# Altium PCB simple-VCA.PcbDoc
Units mm, origin at the board's own origin, x right, y up, seen from the top; angles counter-clockwise.
Board outline 70 x 95 mm, 2 copper layers (Top Layer, Bottom Layer), stack 1.584 mm thick; 98 components, 53 nets, 269 pads, 0 vias.
Unrouted connection lines stored in the file: 182.
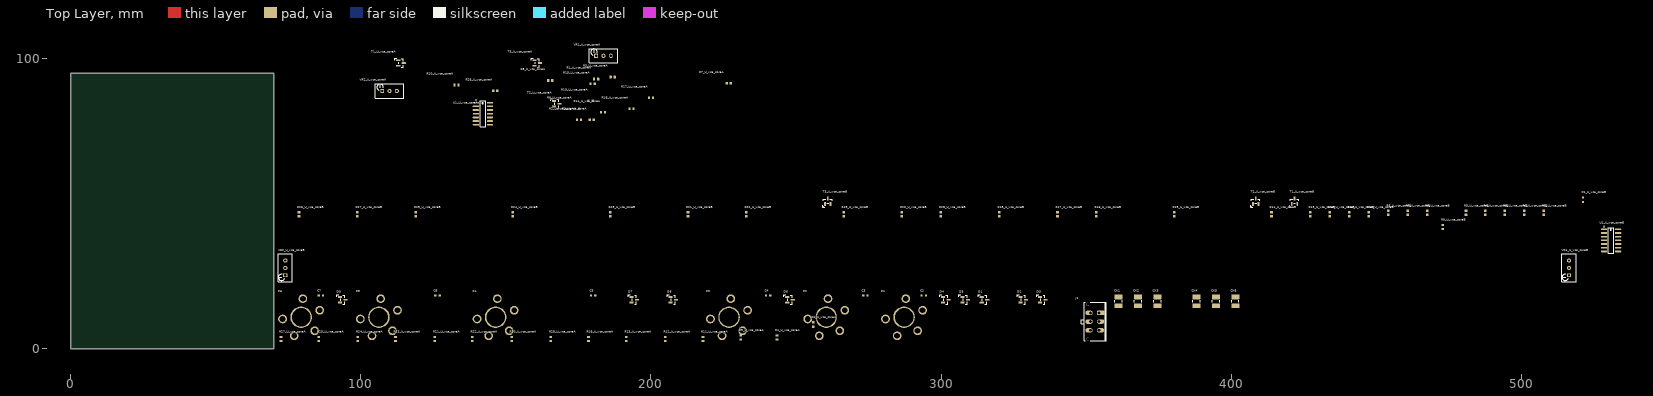
[diagram p0: Top Layer view]
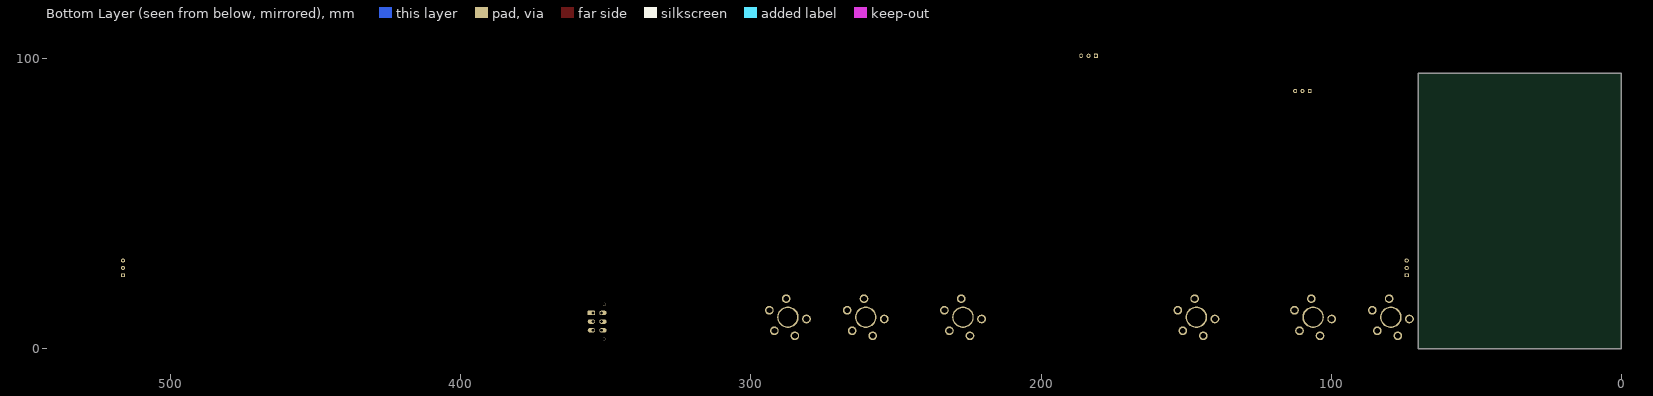
[diagram p1: Bottom Layer view, seen from below]

## Layer stack, top to bottom
Top Solder Mask: solder mask 0.005, Solder Resist, Dk 3.5
Top Layer: signal copper 0.035
Dielectric 1: core 1.514, FR-4, Dk 4.2
Bottom Layer: signal copper 0.035
Botom Solder Mask: solder mask 0.005, Solder Resist, Dk 3.5

## Board outline
0,0 0,95 70,95 70,0

## Design rules (kind name [scope] priority, off if disabled: settings)
AssemblyTestPointUsage [All] p1 off: valid=2 // Not used
AssemblyTestpoint AssemblyTestpoint_THT [(IsVia) Or (IsPad And OnMultiLayer)] p1: testpointundercomponent=TRUE minsize=0 maxsize=100 preferedsize=0 minholesize=0 maxholesize=100 preferedholesize=0 testpointgrid=0.025 usegrid=FALSE gridtolerance=0 allowsidetop=TRUE allowsidebottom=TRUE minspacing=2.54 // THT testpoints (component pads)
AssemblyTestpoint AssemblyTestpoint_SMD [(IsPad And (OnTopLayer Or OnBottomLayer)) and not(HasFootprint('FXPSWITCH_PAD') or HasFootprint ('FXPSWITCH_PAD_ALT1'))] p2: testpointundercomponent=TRUE minsize=1 maxsize=100 preferedsize=0 minholesize=0 maxholesize=100 preferedholesize=0 testpointgrid=0.025 usegrid=FALSE gridtolerance=0 allowsidetop=TRUE allowsidebottom=TRUE minspacing=2.54 padholecenterclearance=1 // SMD testpoints except present switch
AssemblyTestpoint [All] p3 off: testpointundercomponent=TRUE minsize=1.016 maxsize=2.54 preferedsize=1.524 minholesize=0 maxholesize=1.016 preferedholesize=0.813 testpointgrid=0.025 usegrid=TRUE gridtolerance=0 allowsidetop=TRUE allowsidebottom=TRUE
BoardOutlineClearance X_BoardOutlineClearance [HasFootprint('MOUSE_BITES_3X_2_4MM') or  HasFootprint('MOUSE_BITES_5X_2_4MM') or HasFootprint('IN_TAB_2_4_EXT')] p1: gap=0 ignorepadtopadclearanceinfootprint=FALSE // Excluded components
BoardOutlineClearance [All] p2: gap=0.3 ignorepadtopadclearanceinfootprint=FALSE
Clearance "NPT Hole" [(InPadClass('NPTH'))] p1: gap=0.3 ignorepadtopadclearanceinfootprint=FALSE except(0: Arc-Hole Track-Hole SMDPad-Hole THPad-Hole Via-Hole Fill-Hole Poly-Hole Region-Hole Text-Hole) // Copper Clearance to NPT Hole
Clearance [All] p2: gap=0.2 ignorepadtopadclearanceinfootprint=FALSE except(0: Arc-Hole Track-Hole SMDPad-Hole THPad-Hole Via-Hole Fill-Hole Poly-Hole Region-Hole Text-Hole)
ComponentClearance [Not (HasFootprint('PASTE_STENCIL')) vs Not (HasFootprint('PASTE_STENCIL'))] p1: gap=0.25 collisioncheckmode=3 verticalgap=0.25 showdistances=TRUE
FabricationTestPointUsage [All] p1 off: valid=0 allowmultiple=FALSE
FabricationTestpoint [All] p1 off: side=3 testpointundercomponent=TRUE minsize=1.016 maxsize=2.54 preferedsize=1.524 minholesize=0 maxholesize=1.016 preferedholesize=0.813 testpointgrid=0.025 allowsidetop=TRUE allowsidebottom=TRUE usegrid=TRUE gridtolerance=0
Height [All] p1: minheight=0 maxheight=80 prefheight=7
HoleSize [All] p1: absolutevalues=TRUE maxlimit=6 minlimit=0.35 maxpercent=80.000 minpercent=20.000
HoleToHoleClearance [All] p1: gap=0.25 allowstackedmicrovias=TRUE
MinimumAnnularRing [All] p1: minimumring=0.2
MinimumSolderMaskSliver [All] p1: minsoldermaskwidth=0.07
PlaneClearance [All] p1: clearance=0.15
PlaneConnect [All] p1: planeconnectstyle=Relief reliefexpansion=0.5 reliefentries=4 reliefconductorwidth=0.25 reliefairgap=0.25
PolygonConnect "Via Connect" [IsVia] p1: connectstyle=Direct reliefconductorwidth=0.254 reliefentries=4 polygonreliefangle="90 Angle" airgapwidth=0.254 // Via connection style
PolygonConnect [All] p2: connectstyle=Relief reliefconductorwidth=0.25 reliefentries=4 polygonreliefangle="90 Angle" airgapwidth=0.25
RoutingCorners [All] p1: cornerstyle=45-Degree minsetback=2.5 maxsetback=2.5
RoutingVias [All] p1: holewidth=0.4 width=0.8 viastyle="Through Hole" minholewidth=0.2 minwidth=0.6 maxholewidth=1 maxwidth=1.6 useviatemplates=TRUE viatemplateguid#1={26E1B80A-D5C0-4505-9623-F9CB59458B7C} viatemplateguid#2={36E1CC21-96E2-49A4-88B6-F2B68A4AE673} viatemplateguid#3={0111366E-BFF6-48C7-B537-6C96D691991D} viatemplateguid#4={0E0C0ADB-85E7-4A3B-837A-9DB01CC425C1} viatemplateguid#5={2AE59D33-7222-4D26-9EBE-4F327D78EEDC} viatemplateguid#6={04F958C5-3098-48F3-841F-9266846BFB57} viatemplateguid#7={3EBD0A92-59C6-4A03-9F1B-9C85124118A6} viatemplateguid#8={D374DE30-929E-4757-A35D-CCDF97954E77} viatemplateguid#9={7387BB7D-B2C7-482F-BFEA-A07FA82CF54E} viatemplatename#1=v50h15m22 viatemplatename#2=v60h20m28 viatemplatename#3=v80h40m48 viatemplatename#4=v110h70m78 viatemplatename#5=v140h90 viatemplatename#6=v160h100m108 viatemplatename#7=v170h110 viatemplatename#8=v200h130 viatemplatename#9=v260h150
SMDEntry [All] p1: side=TRUE corner=FALSE anyangle=FALSE
SMDEntry ResistorArray_Exit [HasFootprint('CAC-50P200X100-8M')] p2: side=TRUE corner=FALSE anyangle=FALSE
SMDToCorner ResistorArray_NeckDown [HasFootprint('CAC-50P200X100-8M')] p1: distance=78740
SilkToSilkClearance [All] p1: silktosilkclearance=0.1
SilkToSolderMaskClearance [IsPad] p1: minsilkscreentomaskgap=0.1 clearancetoexposedcopper=FALSE
SolderMaskExpansion "PTH Via" [IsVia] p1: expansion=0.075 istentingtop=FALSE soldermaskfromhole=TRUE
SolderMaskExpansion [All] p2: expansion=0.1 istentingtop=FALSE
Width [All] p1: maxlimit=5 minlimit=0.15 preferedwidth=0.3
16 further rules are at their usual default settings.

## Classes and differential pairs
channel class vca_core: U_vca_coreA U_vca_coreB
component class U_vca_coreB: C1_U_vca_coreB R1_U_vca_coreB R2_U_vca_coreB R3_U_vca_coreB R4_U_vca_coreB R5_U_vca_coreB R6_U_vca_coreB R7_U_vca_coreB R8_U_vca_coreB R9_U_vca_coreB R10_U_vca_coreB R11_U_vca_coreB R12_U_vca_coreB R13_U_vca_coreB R14_U_vca_coreB R15_U_vca_coreB R16_U_vca_coreB R17_U_vca_coreB R18_U_vca_coreB R19_U_vca_coreB R20_U_vca_coreB R21_U_vca_coreB R22_U_vca_coreB R23_U_vca_coreB R24_U_vca_coreB R25_U_vca_coreB R26_U_vca_coreB R27_U_vca_coreB R28_U_vca_coreB T1_U_vca_coreB T2_U_vca_coreB T3_U_vca_coreB U1_U_vca_coreB VR1_U_vca_coreB VR2_U_vca_coreB
component class U_vca_coreA: C1_U_vca_coreA R1_U_vca_coreA R2_U_vca_coreA R3_U_vca_coreA R4_U_vca_coreA R5_U_vca_coreA R6_U_vca_coreA R7_U_vca_coreA R8_U_vca_coreA R9_U_vca_coreA R10_U_vca_coreA R11_U_vca_coreA R12_U_vca_coreA R13_U_vca_coreA R14_U_vca_coreA R15_U_vca_coreA R16_U_vca_coreA R17_U_vca_coreA R18_U_vca_coreA R19_U_vca_coreA R20_U_vca_coreA R21_U_vca_coreA R22_U_vca_coreA R23_U_vca_coreA R24_U_vca_coreA R25_U_vca_coreA R26_U_vca_coreA R27_U_vca_coreA R28_U_vca_coreA T1_U_vca_coreA T2_U_vca_coreA T3_U_vca_coreA U1_U_vca_coreA VR1_U_vca_coreA VR2_U_vca_coreA
component class main: C2 C3 C4 C5 C6 C7 CK1 CK2 CK3 CK4 CK5 CK6 D1 D2 D3 D4 D5 D6 D7 D8 D9 J1 P1 P2 P3 P4 P5 P6

## Components (designator, comment, footprint, x,y, rotation, side; value= is the part's Value field where it differs from the comment)
C1_U_vca_coreA "100nF" WCAP-CSGP_0603_L1.6W0.8H0.8_Reflow 255.969,8.391 r90 top (schematic designator C1)
C1_U_vca_coreB "100nF" WCAP-CSGP_0603_L1.6W0.8H0.8_Reflow 521.314,51.391 r90 top (schematic designator C1)
C2 "100nF" WCAP-CSGP_0603_L1.6W0.8H0.8_Reflow 294.052,18.391 r0 top
C3 "100nF" WCAP-CSGP_0603_L1.6W0.8H0.8_Reflow 273.938,18.391 r0 top
C4 "100nF" WCAP-CSGP_0603_L1.6W0.8H0.8_Reflow 240.414,18.391 r0 top
C5 "100nF" WCAP-CSGP_0603_L1.6W0.8H0.8_Reflow 180.071,18.391 r0 top
C6 "100nF" WCAP-CSGP_0603_L1.6W0.8H0.8_Reflow 126.433,18.391 r0 top
C7 "100nF" WCAP-CSGP_0603_L1.6W0.8H0.8_Reflow 86.204,18.391 r0 top
CK1 "10u" CAPC3225X27N(SMC1210) 361.225,16.391 r90 top
CK2 "10u" CAPC3225X27N(SMC1210) 367.929,16.391 r90 top
CK3 "10u" CAPC3225X27N(SMC1210) 374.634,16.391 r90 top
CK4 "10u" CAPC3225X27N(SMC1210) 388.044,16.391 r90 top
CK5 "10u" CAPC3225X27N(SMC1210) 394.748,16.391 r90 top
CK6 "10u" CAPC3225X27N(SMC1210) 401.453,16.391 r90 top
D1 "BAV99" SOT95P230X110-3N(SOT23) 314.991,16.891 r0 top
D2 "BAV99" SOT95P230X110-3N(SOT23) 328.401,16.891 r0 top
D3 "BAV99" SOT95P230X110-3N(SOT23) 335.106,16.891 r0 top
D4 "BAV99" SOT95P230X110-3N(SOT23) 301.582,16.891 r0 top
D5 "BAV99" SOT95P230X110-3N(SOT23) 308.286,16.891 r0 top
D6 "BAV99" SOT95P230X110-3N(SOT23) 247.944,16.891 r0 top
D7 "BAV99" SOT95P230X110-3N(SOT23) 194.305,16.891 r0 top
D8 "BAV99" SOT95P230X110-3N(SOT23) 207.715,16.891 r0 top
D9 "BAV99" SOT95P230X110-3N(SOT23) 93.734,16.891 r0 top
J1 "W4230-06PDSTB0R" W4230-06PDS 353.025,9.391 r90 top
P1 "NYS232" NYS232 287.267,10.891 r0 top
P2 "NYS232" NYS232 260.448,10.891 r0 top
P3 "NYS232" NYS232 226.925,10.891 r0 top
P4 "NYS232" NYS232 146.467,10.891 r0 top
P5 "NYS232" NYS232 106.239,10.891 r0 top
P6 "NYS232" NYS232 79.42,10.891 r0 top
R1_U_vca_coreA "10k" RESC1608X06N(SMR0603) 181.106,93 r0 top (schematic designator R1)
R1_U_vca_coreB "10k" RESC1608X06N(SMR0603) 501.075,46.891 r90 top (schematic designator R1)
R2_U_vca_coreA "10k" RESC1608X06N(SMR0603) 175.191,79 r0 top (schematic designator R2)
R2_U_vca_coreB "10k" RESC1608X06N(SMR0603) 507.779,46.891 r90 top (schematic designator R2)
R3_U_vca_coreA "100k" RESC1608X06N(SMR0603) 186.8,93.7 r0 top (schematic designator R3)
R3_U_vca_coreB "100k" RESC1608X06N(SMR0603) 494.37,46.891 r90 top (schematic designator R3)
R4_U_vca_coreA "100k" RESC1608X06N(SMR0603) 243.469,3.891 r90 top (schematic designator R4)
R4_U_vca_coreB "100k" RESC1608X06N(SMR0603) 487.665,46.891 r90 top (schematic designator R4)
R5_U_vca_coreA "100k" RESC1608X06N(SMR0603) 230.969,3.891 r90 top (schematic designator R5)
R5_U_vca_coreB "100k" RESC1608X06N(SMR0603) 480.96,46.891 r90 top (schematic designator R5)
R6_U_vca_coreA "10k" RESC1608X06N(SMR0603) 174.491,82.7 r0 top (schematic designator R6)
R6_U_vca_coreB "10k" RESC1608X06N(SMR0603) 454.141,46.891 r90 top (schematic designator R6)
R7_U_vca_coreA "10k" RESC1608X06N(SMR0603) 226.829,91.5 r0 top (schematic designator R7)
R7_U_vca_coreB "10k" RESC1608X06N(SMR0603) 460.846,46.891 r90 top (schematic designator R7)
R8_U_vca_coreA "10k" RESC1608X06N(SMR0603) 165.286,92.5 r0 top (schematic designator R8)
R8_U_vca_coreB "10k" RESC1608X06N(SMR0603) 467.551,46.891 r90 top (schematic designator R8)
R9_U_vca_coreA "10k" RESC1608X06N(SMR0603) 179.646,79 r0 top (schematic designator R9)
R9_U_vca_coreB "10k" RESC1608X06N(SMR0603) 473,42 r90 top (schematic designator R9)
R10_U_vca_coreA "10k" RESC1608X06N(SMR0603) 132.963,90.929 r0 top (schematic designator R10)
R10_U_vca_coreB "10k" RESC1608X06N(SMR0603) 447.437,46.391 r90 top (schematic designator R10)
R11_U_vca_coreA "100k" RESC1608X06N(SMR0603) 217.969,3.391 r90 top (schematic designator R11)
R11_U_vca_coreB "100k" RESC1608X06N(SMR0603) 440.732,46.391 r90 top (schematic designator R11)
R12_U_vca_coreA "10k" RESC1608X06N(SMR0603) 204.969,3.391 r90 top (schematic designator R12)
R12_U_vca_coreB "10k" RESC1608X06N(SMR0603) 434.027,46.391 r90 top (schematic designator R12)
R13_U_vca_coreA "100k" RESC1608X06N(SMR0603) 191.469,3.391 r90 top (schematic designator R13)
R13_U_vca_coreB "100k" RESC1608X06N(SMR0603) 427.322,46.391 r90 top (schematic designator R13)
R14_U_vca_coreA "100k" RESC1608X06N(SMR0603) 183.5,81.5 r0 top (schematic designator R14)
R14_U_vca_coreB "100k" RESC1608X06N(SMR0603) 413.913,46.391 r90 top (schematic designator R14)
R15_U_vca_coreA "1k" RESC1608X06N(SMR0603) 179.896,91.379 r0 top (schematic designator R15)
R15_U_vca_coreB "1k" RESC1608X06N(SMR0603) 380.389,46.391 r90 top (schematic designator R15)
R16_U_vca_coreA "100k" RESC1608X06N(SMR0603) 178.47,3.391 r90 top (schematic designator R16)
R16_U_vca_coreB "100k" RESC1608X06N(SMR0603) 353.57,46.391 r90 top (schematic designator R16)
R17_U_vca_coreA "10k" RESC1608X06N(SMR0603) 200.01,86.5 r0 top (schematic designator R17)
R17_U_vca_coreB "10k" RESC1608X06N(SMR0603) 340.16,46.391 r90 top (schematic designator R17)
R18_U_vca_coreA "100k" RESC1608X06N(SMR0603) 193.305,82.7 r0 top (schematic designator R18)
R18_U_vca_coreB "100k" RESC1608X06N(SMR0603) 320.046,46.391 r90 top (schematic designator R18)
R19_U_vca_coreA "10k" RESC1608X06N(SMR0603) 179.196,85.5 r0 top (schematic designator R19)
R19_U_vca_coreB "10k" RESC1608X06N(SMR0603) 266.408,46.391 r90 top (schematic designator R19)
R20_U_vca_coreA "10k" RESC1608X06N(SMR0603) 151.97,3.391 r90 top (schematic designator R20)
R20_U_vca_coreB "10k" RESC1608X06N(SMR0603) 286.522,46.391 r90 top (schematic designator R20)
R21_U_vca_coreA "10k" RESC1608X06N(SMR0603) 125.47,3.391 r90 top (schematic designator R21)
R21_U_vca_coreB "10k" RESC1608X06N(SMR0603) 212.77,46.391 r90 top (schematic designator R21)
R22_U_vca_coreA "10k" RESC1608X06N(SMR0603) 138.47,3.391 r90 top (schematic designator R22)
R22_U_vca_coreB "10k" RESC1608X06N(SMR0603) 232.884,46.391 r90 top (schematic designator R22)
R23_U_vca_coreA "10k" RESC1608X06N(SMR0603) 111.97,3.391 r90 top (schematic designator R23)
R23_U_vca_coreB "10k" RESC1608X06N(SMR0603) 185.951,46.391 r90 top (schematic designator R23)
R24_U_vca_coreA "10k" RESC1608X06N(SMR0603) 98.97,3.391 r90 top (schematic designator R24)
R24_U_vca_coreB "10k" RESC1608X06N(SMR0603) 152.427,46.391 r90 top (schematic designator R24)
R25_U_vca_coreA "10k" RESC1608X06N(SMR0603) 85.47,3.391 r90 top (schematic designator R25)
R25_U_vca_coreB "10k" RESC1608X06N(SMR0603) 118.903,46.391 r90 top (schematic designator R25)
R26_U_vca_coreA "10k" RESC1608X06N(SMR0603) 146.372,89 r0 top (schematic designator R26)
R26_U_vca_coreB "10k" RESC1608X06N(SMR0603) 78.674,46.391 r90 top (schematic designator R26)
R27_U_vca_coreA "10k" RESC1608X06N(SMR0603) 72.47,3.391 r90 top (schematic designator R27)
R27_U_vca_coreB "10k" RESC1608X06N(SMR0603) 98.789,46.391 r90 top (schematic designator R27)
R28_U_vca_coreA "100k" RESC1608X06N(SMR0603) 165.47,3.391 r90 top (schematic designator R28)
R28_U_vca_coreB "100k" RESC1608X06N(SMR0603) 299.932,46.391 r90 top (schematic designator R28)
T1_U_vca_coreA "BC817-40" SOT95P230X110-3N(SOT23) 113.848,98.5 r0 top (schematic designator T1)
T1_U_vca_coreB "BC817-40" SOT95P230X110-3N(SOT23) 421.867,50.891 r90 top (schematic designator T1)
T2_U_vca_coreA "BC817-40" SOT95P230X110-3N(SOT23) 167.486,84.5 r0 top (schematic designator T2)
T2_U_vca_coreB "BC817-40" SOT95P230X110-3N(SOT23) 408.458,50.891 r90 top (schematic designator T2)
T3_U_vca_coreA "BC817-40" SOT95P230X110-3N(SOT23) 160.782,98.5 r0 top (schematic designator T3)
T3_U_vca_coreB "BC817-40" SOT95P230X110-3N(SOT23) 260.953,50.891 r90 top (schematic designator T3)
U1_U_vca_coreA "OPA4197ID" SOIC127P600X175-14N(SO-14) 142.092,81.04 r0 top (schematic designator U1)
U1_U_vca_coreB "OPA4197ID" SOIC127P600X175-14N(SO-14) 530.969,37.391 r0 top (schematic designator U1)
VR1_U_vca_coreA "500" 64W 183.646,101 r0 top (schematic designator VR1)
VR1_U_vca_coreB "500" 64W 516.484,27.891 r90 top (schematic designator VR1)
VR2_U_vca_coreA "" 64W 109.894,88.879 r0 top (schematic designator VR2)
VR2_U_vca_coreB "" 64W 73.97,27.891 r90 top (schematic designator VR2)

## Footprints (in the part's own frame and the unit in brackets; to place one, negate y for a bottom-side part, rotate by r counter-clockwise, add the part's x,y. Pads: shape width x height; smd on the part's side, far side on the other; paste and mask are expansions set on the pad)
64W [mm] "Multi-Turn Cermet Trimmer, Square 10mm"
  rrect20% 1.3x1.5 hole 0.8: 1(-2.54,0)
  oval 1.3x1.5 hole 0.8: 2(0,0) 3(2.54,0)
  silkscreen extent -4.85,-2.45 4.85,2.45, body extent -4.85,-2.5 4.85,2.5, height 11.1
CAPC3225X27N(SMC1210) [mm] "Chip Capacitor, 2-Leads, Body 3,20x2,50mm, IPC Medium Density"
  rrect20% 1.6x2.8 smd: 1(-1.5,0) 2(1.5,0)
  silkscreen extent -0.4,-1.25 0.4,1.25, body extent -1.65,-1.35 1.65,1.35, height 2.7
NYS232 [mm]
  round 3 hole 2: 1(4.67,-4.67) 2(6.4,2.4) 3(0.6,6.4) 4(-6.4,-0.6) 5(-2.4,-6.4)
  round 7.4 hole 6.4: 6(0,0)
  body extent -7.85,-7.85 7.85,7.85, height 31.31
RESC1608X06N(SMR0603) [mm] "Chip Resistor, 2-Leads, Body 1,60x0,80mm, IPC Medium Density"
  rrect20% 0.8x0.9 smd: 1(-0.7,0) 2(0.7,0)
  body extent -0.87,-0.45 0.88,0.45, height 0.55
SOIC127P600X175-14N(SO-14) [mm] "SOIC, 14-Leads, Body 8,65x3,90mm, Pitch 1,27mm, IPC Medium Density"
  rrect20% 2.2x0.6 smd: 1(-2.425,3.81)
  oval 2.2x0.6 smd: 2(-2.425,2.54) 3(-2.425,1.27) 4(-2.425,0) 5(-2.425,-1.27) 6(-2.425,-2.54) 7(-2.425,-3.81) 8(2.425,-3.81) 9(2.425,-2.54) 10(2.425,-1.27) 11(2.425,0) 12(2.425,1.27) 13(2.425,2.54) 14(2.425,3.81)
  silkscreen extent -2.55,-4.4 0.93,4.78, body extent -3,-4.4 3,4.4, height 1.7
SOT95P230X110-3N(SOT23) [mm]
  rrect20% 1.4x0.6 smd: 1(-0.95,0.95) 2(-0.95,-0.95) 3(0.95,0)
  silkscreen extent -2.1,-1.5 0.7,1.7, body extent -1.4,-1.45 1.4,1.45, height 1.3
W4230-06PDS [mm] "Micro-Fit 3.0 Header, THT, Dual Row, Vertical, with PCB Polarizing Peg, 6 Circuits, with mate"
  rrect20% 1.5x2.5 hole 1 copper offset 0,-0.5: 1(3,-1.5)
  oval 1.5x2.5 hole 1 copper offset 0,-0.5: 2(0,-1.5) 3(-3,-1.5)
  oval 1.5x2.5 hole 1 copper offset 0,0.5: 4(3,1.5) 5(0,1.5) 6(-3,1.5)
  round 1 hole 1 unplated: #(-6,2.44) #(6,2.44)
  silkscreen extent -6.63,-4 6.63,4.69, body extent -6.57,-4.14 6.58,6.71, height 17.5
WCAP-CSGP_0603_L1.6W0.8H0.8_Reflow [mm] "Ceramic Capacitors, body 1.6x0.8mm"
  rect 0.8x0.8 smd: 1(-0.75,0) 2(0.75,0)
  body extent -0.8,-0.4 0.8,0.4, height 0.8

## Part data
C1_U_vca_coreA C1_U_vca_coreB C2 C3 C4 C5 C6 C7: library part 885012206095, "WCAP-CSGP Multilayer Ceramic Chip Capacitor, General Purpose, size 0603, X7R, 100nF, 50V", Capacitance Tolerance=+/-10%, Isolation Resistance=5GOhm, Manufacturer="Wurth Elektronik", Operating Temperature max.=125C, Operating Temperature min.=-55C, Rated Voltage=50V, Capacitance=100nF, Ceramic Type=X7R, ComponentLink1Description="Manufacturer Link", ComponentLink1URL=http://www.we-online.de, ComponentLink2Description=Datasheet, ComponentLink2URL=https://www.we-online.com/catalog/datasheet/885012206095.pdf, Dissipation Factor=3%, Height=0.8mm, Length=1.6mm, Manufacturer Part Number=885012206095, Mounting Technology=SMT, Packaging="Tape and Reel", Size=0603, Technical Reference=X7R0603104K050DFCT10000, Width=0.8mm
CK1 CK2 CK3 CK4 CK5 CK6: library part ECK+10U50VXX0, "C; 10u; 50V; 10%; X7R; ??;", Capacitance_F=1E-5, Dielectric_Type=X7R, Manufacturer="Murata: GRM32ER71H106KA12L;;Samsung Electro-mechanics: CL32B106KBJNNNE", Tolerance_Pct=10, Voltage_Rating_V=50, Component_Class=Capacitor, ComponentLink1Description=Helios, ComponentLink1URL=heliosgreen://v1/hegMT/5-MT/Classes(343)/Folders/OpenForm?RecordNumbers=[10658879], ComponentLink2Description=ECK+10U50VXX0_MurataEN100.pdf, ComponentLink2URL=I:\DataSheets\ECK+10U50VXX0_MurataEN100.pdf, ComponentLink3Description=ECK+10U50VXX0_SamsungEN100.pdf, ComponentLink3URL=I:\DataSheets\ECK+10U50VXX0_SamsungEN100.pdf, KK=ECK+10U50VXX0, Note="X7R, 9uF @ 10V, 5uF @ 30V, 2.5uF @ 50V", SMD=1, Status_I=Production, Status_II=Active
J1: library part EJ-W4230-06PDSTB0RXX0, "Con; Micro Fit 3.0; 6x; PCB; Straight; 250V; 5A; Male; Tin; ??;", Current_Rating_A=5, Manufacturer="HSUAN MAO: W4230-06PDSTB0R;;HSUAN MAO: W4230-06PDSTB0N;;HSM: W4230-06PDSTB0R;;HSM: W4230-06PDSTB0N", Voltage_Rating_V=250, Angle=Straight, Component_Class=Connector, ComponentLink1Description=Helios, ComponentLink1URL=heliosgreen://v1/hegMT/5-MT/Classes(343)/Folders/OpenForm?RecordNumbers=[6765380], ComponentLink2Description=EJ-W4230-XXPDSXB0RXX0_HsuanMao.pdf, ComponentLink2URL=i:\datasheets\EJ-W4230-XXPDSXB0RXX0_HsuanMao.pdf, ComponentLink3Description=EJ-W4230-XXPDSTB0NXX0_HsuanMaoEN100.pdf, ComponentLink3URL=I:\datasheets\EJ-W4230-XXPDSTB0NXX0_HsuanMaoEN100.pdf, Connector_Family="Micro Fit 3.0", Gender=Male, KK=EJ-W4230-06PDSTB0RXX0, Mounting_Style=PCB, Multiplicity=6, Plating=Tin, SMD=0, Status_I=Production, Status_II=Active, System=Connector
P1 P2 P3 P4 P5 P6: "6.3 mm jack, right angle, THT"
R1_U_vca_coreA R1_U_vca_coreB R2_U_vca_coreA R2_U_vca_coreB R3_U_vca_coreA R3_U_vca_coreB R4_U_vca_coreA R4_U_vca_coreB R5_U_vca_coreA R5_U_vca_coreB R6_U_vca_coreA R6_U_vca_coreB R7_U_vca_coreA R7_U_vca_coreB R8_U_vca_coreA R8_U_vca_coreB R9_U_vca_coreA R9_U_vca_coreB R10_U_vca_coreA R10_U_vca_coreB R11_U_vca_coreA R11_U_vca_coreB R12_U_vca_coreA R12_U_vca_coreB R13_U_vca_coreA R13_U_vca_coreB R14_U_vca_coreA R14_U_vca_coreB R15_U_vca_coreA R15_U_vca_coreB R16_U_vca_coreA R16_U_vca_coreB R17_U_vca_coreA R17_U_vca_coreB R18_U_vca_coreA R18_U_vca_coreB R19_U_vca_coreA R19_U_vca_coreB R20_U_vca_coreA R20_U_vca_coreB R21_U_vca_coreA R21_U_vca_coreB R22_U_vca_coreA R22_U_vca_coreB R23_U_vca_coreA R23_U_vca_coreB R24_U_vca_coreA R24_U_vca_coreB R25_U_vca_coreA R25_U_vca_coreB R26_U_vca_coreA R26_U_vca_coreB R27_U_vca_coreA R27_U_vca_coreB R28_U_vca_coreA R28_U_vca_coreB: library part "R 0603 universal", "Thick Film resistor, 0603 Size, universal value, 0.1 W", Package=0603, Tolerance & Rating=1%/0.1W, ComponentLink1Description=ER+xxxx0.1W0603XXx_YageoEN100.pdf, ComponentLink1URL=i:\DataSheets\ER+xxxx0.1W0603XXx_YageoEN100.pdf, ComponentLink3Description="rezistor čip", ComponentLink3URL=heliosgreen://v1/hegMT/5-MT/Classes(343)/Folders/OpenForm?RecordNumbers=[6094847], consumption=0, RPP=0,0188, SMD=1
T1_U_vca_coreA T1_U_vca_coreB T2_U_vca_coreA T2_U_vca_coreB T3_U_vca_coreA T3_U_vca_coreB: library part ET+BC817-40XX0, "SSw; NPN; ??Ohm; 45V; 0.5A; 1x;", Current_Rating_A=0.5, Manufacturer="NXP: BC817-40,215;;PHILIPS: BC817-40;;INFINEON: BC817-40;;FAI: BC817-40;;STM: BC817-40;;ONS: BC817-40;;NEXPERIA: BC817-40;;NEXPERIA: BC817-40,235", Voltage_Rating_V=45, Component_Class="Semiconductor Switch", ComponentLink1Description=Helios, ComponentLink1URL=heliosgreen://v1/hegMT/5-MT/Classes(343)/Folders/OpenForm?RecordNumbers=[382033], ComponentLink2Description="ET+BC817-40XX0_Philips (NXP).pdf", ComponentLink2URL="i:\datasheets\ET+BC817-40XX0_Philips (NXP).pdf", ComponentLink3Description=ET+BC817-40XX0-a.jpg, ComponentLink3URL=i:\DataSheets\SMD_parts_pictures\ET+BC817-40XX0-a.jpg, ComponentLink4Description=ET+BC817-40XX0_OnsemiEN100.pdf, ComponentLink4URL=I:\datasheets\ET+BC817-40XX0_OnsemiEN100.pdf, ComponentLink5Description=ET+BC817-40XX0_spec_OnsemiEN100.pdf, ComponentLink5URL=I:\datasheets\ET+BC817-40XX0_spec_OnsemiEN100.pdf, KK=ET+BC817-40XX0, Multiplicity=1, Semiconductor_Switch_Type=NPN, SMD=1, Status_I=Production, Status_II=Active
U1_U_vca_coreA U1_U_vca_coreB: library part EU+OPA4197IDRXX0, "IC; Opamp; 4.5V; 36V; 4x;", Manufacturer="Texas Instruments: OPA4197IDR", Component_Class=IC, ComponentLink1Description=Helios, ComponentLink1URL=heliosgreen://v1/hegMT/5-MT/Classes(343)/Folders/OpenForm?RecordNumbers=[10961893], ComponentLink2Description=EU+OPA4197IDRXX0_TexasEN100.pdf, ComponentLink2URL=I:\DataSheets\EU+OPA4197IDRXX0_TexasEN100.pdf, IC_Type=Opamp, KK=EU+OPA4197IDRXX0, Multiplicity=4, Note="Precision, Rail-to-Rail Input/Output, Low Offset Voltage, Operational Amplifiers", SMD=1, Status_I=Production, Status_II=Active, Vmax_V=36, Vmin_V=4.5
VR1_U_vca_coreA VR1_U_vca_coreB VR2_U_vca_coreA VR2_U_vca_coreB: library part "Trimmer universal 3/8 (10mm)", "093 - 3/8\" Square (10 mm) Multi-Turn Cermet Trimmer", ComponentLink1Description=Datasheet, KK=ERP-10K0.5WXX0, SMD=0
D1 D2 D3 D4 D5 D6 D7 D8 D9: ComponentLink1Description="New link", ComponentLink1URL=C:\Users\Public\Documents\Altium\DSH\EDD+BAV99XX0_OnsemiEN100.PDF

## Nets (pads, with @x,y where several pads share a name; then routed paths per layer and width w, separated by ;. In a path a pad name is that pad's centre, name@x,y a point inside that pad or via, vN(x,y) a via of type N, cw(c..) or ccw(c..) an arc to the next point about the centre after c; other vN are vias at no path point)
+5: CK4.1 D3.2 J1.5
+12: CK3.1 D2.2 J1.3
+15: C1_U_vca_coreA.2 C1_U_vca_coreB.2 C2.2 C3.2 C4.2 C5.2 C6.2 C7.2 CK1.1 CK2.1 D1.2 D4.2 D5.2 D6.2 D7.2 D8.2 D9.2 J1.6 U1_U_vca_coreA.4 U1_U_vca_coreB.4 VR1_U_vca_coreA.2 VR1_U_vca_coreB.2 VR2_U_vca_coreA.3 VR2_U_vca_coreB.3
-15: C1_U_vca_coreA.1 C1_U_vca_coreB.1 C2.1 C3.1 C5.1 C6.1 CK5.1 CK6.1 D1.1 D4.1 D5.1 D7.1 D8.1 J1.1 R26_U_vca_coreA.2 R26_U_vca_coreB.2 R27_U_vca_coreA.2 R27_U_vca_coreB.2 U1_U_vca_coreA.11 U1_U_vca_coreB.11 VR2_U_vca_coreA.1 VR2_U_vca_coreB.1
GND: C4.1 C7.1 CK1.2 CK2.2 CK3.2 CK4.2 CK5.2 CK6.2 D1.3 D2.3 D3.3 D6.1 D9.1 J1.2 J1.4 P1.1 P2.1 P3.1 P4.1 P5.1 P6.1 R14_U_vca_coreA.1 R14_U_vca_coreB.1 R15_U_vca_coreA.2 R15_U_vca_coreB.2 T1_U_vca_coreA.1 T1_U_vca_coreB.1 T3_U_vca_coreA.3 T3_U_vca_coreB.3 U1_U_vca_coreA.3 U1_U_vca_coreA.5 U1_U_vca_coreB.3 U1_U_vca_coreB.5
NetD4_3: D4.3 P1.4 R11_U_vca_coreB.1
NetD5_3: D5.3 P2.4 R4_U_vca_coreB.1 U1_U_vca_coreB.8
NetD6_3: D6.3 P3.4 R18_U_vca_coreB.2 R28_U_vca_coreB.2
NetD7_3: D7.3 P4.4 R11_U_vca_coreA.1
NetD8_3: D8.3 P5.4 R4_U_vca_coreA.1 U1_U_vca_coreA.8
NetD9_3: D9.3 P6.4 R18_U_vca_coreA.2 R28_U_vca_coreA.2
NetR1_U_vca_coreA_1: R1_U_vca_coreA.1 VR1_U_vca_coreA.3
NetR1_U_vca_coreA_2: R1_U_vca_coreA.2 R6_U_vca_coreA.1 R7_U_vca_coreA.1
NetR1_U_vca_coreB_1: R1_U_vca_coreB.1 VR1_U_vca_coreB.3
NetR1_U_vca_coreB_2: R1_U_vca_coreB.2 R6_U_vca_coreB.1 R7_U_vca_coreB.1
NetR2_U_vca_coreA_1: R2_U_vca_coreA.1 VR1_U_vca_coreA.1
NetR2_U_vca_coreA_2: R2_U_vca_coreA.2 R8_U_vca_coreA.1 R9_U_vca_coreA.1
NetR2_U_vca_coreB_1: R2_U_vca_coreB.1 VR1_U_vca_coreB.1
NetR2_U_vca_coreB_2: R2_U_vca_coreB.2 R8_U_vca_coreB.1 R9_U_vca_coreB.1
NetR3_U_vca_coreA_1: R3_U_vca_coreA.1 R5_U_vca_coreA.1 R11_U_vca_coreA.2 U1_U_vca_coreA.6
NetR3_U_vca_coreA_2: R3_U_vca_coreA.2 R5_U_vca_coreA.2 R13_U_vca_coreA.1 U1_U_vca_coreA.7
NetR3_U_vca_coreB_1: R3_U_vca_coreB.1 R5_U_vca_coreB.1 R11_U_vca_coreB.2 U1_U_vca_coreB.6
NetR3_U_vca_coreB_2: R3_U_vca_coreB.2 R5_U_vca_coreB.2 R13_U_vca_coreB.1 U1_U_vca_coreB.7
NetR4_U_vca_coreA_2: R4_U_vca_coreA.2 R10_U_vca_coreA.1 U1_U_vca_coreA.9
NetR4_U_vca_coreB_2: R4_U_vca_coreB.2 R10_U_vca_coreB.1 U1_U_vca_coreB.9
NetR6_U_vca_coreA_2: R6_U_vca_coreA.2 R7_U_vca_coreA.2 R12_U_vca_coreA.2 T2_U_vca_coreA.3
NetR6_U_vca_coreB_2: R6_U_vca_coreB.2 R7_U_vca_coreB.2 R12_U_vca_coreB.2 T2_U_vca_coreB.3
NetR8_U_vca_coreA_2: R8_U_vca_coreA.2 R9_U_vca_coreA.2 R10_U_vca_coreA.2 T1_U_vca_coreA.3
NetR8_U_vca_coreB_2: R8_U_vca_coreB.2 R9_U_vca_coreB.2 R10_U_vca_coreB.2 T1_U_vca_coreB.3
NetR12_U_vca_coreA_1: R12_U_vca_coreA.1 R14_U_vca_coreA.2 U1_U_vca_coreA.10
NetR12_U_vca_coreB_1: R12_U_vca_coreB.1 R14_U_vca_coreB.2 U1_U_vca_coreB.10
NetR13_U_vca_coreA_2: R13_U_vca_coreA.2 R15_U_vca_coreA.1 T2_U_vca_coreA.1
NetR13_U_vca_coreB_2: R13_U_vca_coreB.2 R15_U_vca_coreB.1 T2_U_vca_coreB.1
NetR16_U_vca_coreA_1: R16_U_vca_coreA.1 R21_U_vca_coreA.1 U1_U_vca_coreA.1
NetR16_U_vca_coreA_2: R16_U_vca_coreA.2 R18_U_vca_coreA.1 R28_U_vca_coreA.1 U1_U_vca_coreA.2
NetR16_U_vca_coreB_1: R16_U_vca_coreB.1 R21_U_vca_coreB.1 U1_U_vca_coreB.1
NetR16_U_vca_coreB_2: R16_U_vca_coreB.2 R18_U_vca_coreB.1 R28_U_vca_coreB.1 U1_U_vca_coreB.2
NetR17_U_vca_coreA_1: R17_U_vca_coreA.1 T1_U_vca_coreA.2 T2_U_vca_coreA.2
NetR17_U_vca_coreA_2: R17_U_vca_coreA.2 R19_U_vca_coreA.1 R20_U_vca_coreA.1
NetR17_U_vca_coreB_1: R17_U_vca_coreB.1 T1_U_vca_coreB.2 T2_U_vca_coreB.2
NetR17_U_vca_coreB_2: R17_U_vca_coreB.2 R19_U_vca_coreB.1 R20_U_vca_coreB.1
NetR19_U_vca_coreA_2: R19_U_vca_coreA.2 R20_U_vca_coreA.2 R24_U_vca_coreA.1 T3_U_vca_coreA.2
NetR19_U_vca_coreB_2: R19_U_vca_coreB.2 R20_U_vca_coreB.2 R24_U_vca_coreB.1 T3_U_vca_coreB.2
NetR21_U_vca_coreA_2: R21_U_vca_coreA.2 R22_U_vca_coreA.1
NetR21_U_vca_coreB_2: R21_U_vca_coreB.2 R22_U_vca_coreB.1
NetR22_U_vca_coreA_2: R22_U_vca_coreA.2 R23_U_vca_coreA.1 T3_U_vca_coreA.1
NetR22_U_vca_coreB_2: R22_U_vca_coreB.2 R23_U_vca_coreB.1 T3_U_vca_coreB.1
NetR23_U_vca_coreA_2: R23_U_vca_coreA.2 R25_U_vca_coreA.1
NetR23_U_vca_coreB_2: R23_U_vca_coreB.2 R25_U_vca_coreB.1
NetR24_U_vca_coreA_2: R24_U_vca_coreA.2 R26_U_vca_coreA.1 R27_U_vca_coreA.1
NetR24_U_vca_coreB_2: R24_U_vca_coreB.2 R26_U_vca_coreB.1 R27_U_vca_coreB.1
NetR25_U_vca_coreA_2: R25_U_vca_coreA.2 VR2_U_vca_coreA.2
NetR25_U_vca_coreB_2: R25_U_vca_coreB.2 VR2_U_vca_coreB.2
pads on no net: D2.1 D3.1 J1.# P1.2 P1.3 P1.5 P1.6 P2.2 P2.3 P2.5 P2.6 P3.2 P3.3 P3.5 P3.6 P4.2 P4.3 P4.5 P4.6 P5.2 P5.3 P5.5 P5.6 P6.2 P6.3 P6.5 P6.6 U1_U_vca_coreA.12 U1_U_vca_coreA.13 U1_U_vca_coreA.14 U1_U_vca_coreB.12 U1_U_vca_coreB.13 U1_U_vca_coreB.14